# EAGLE board IO4-QuadAnalogSwitch-fake (EAGLE 7.7.0)
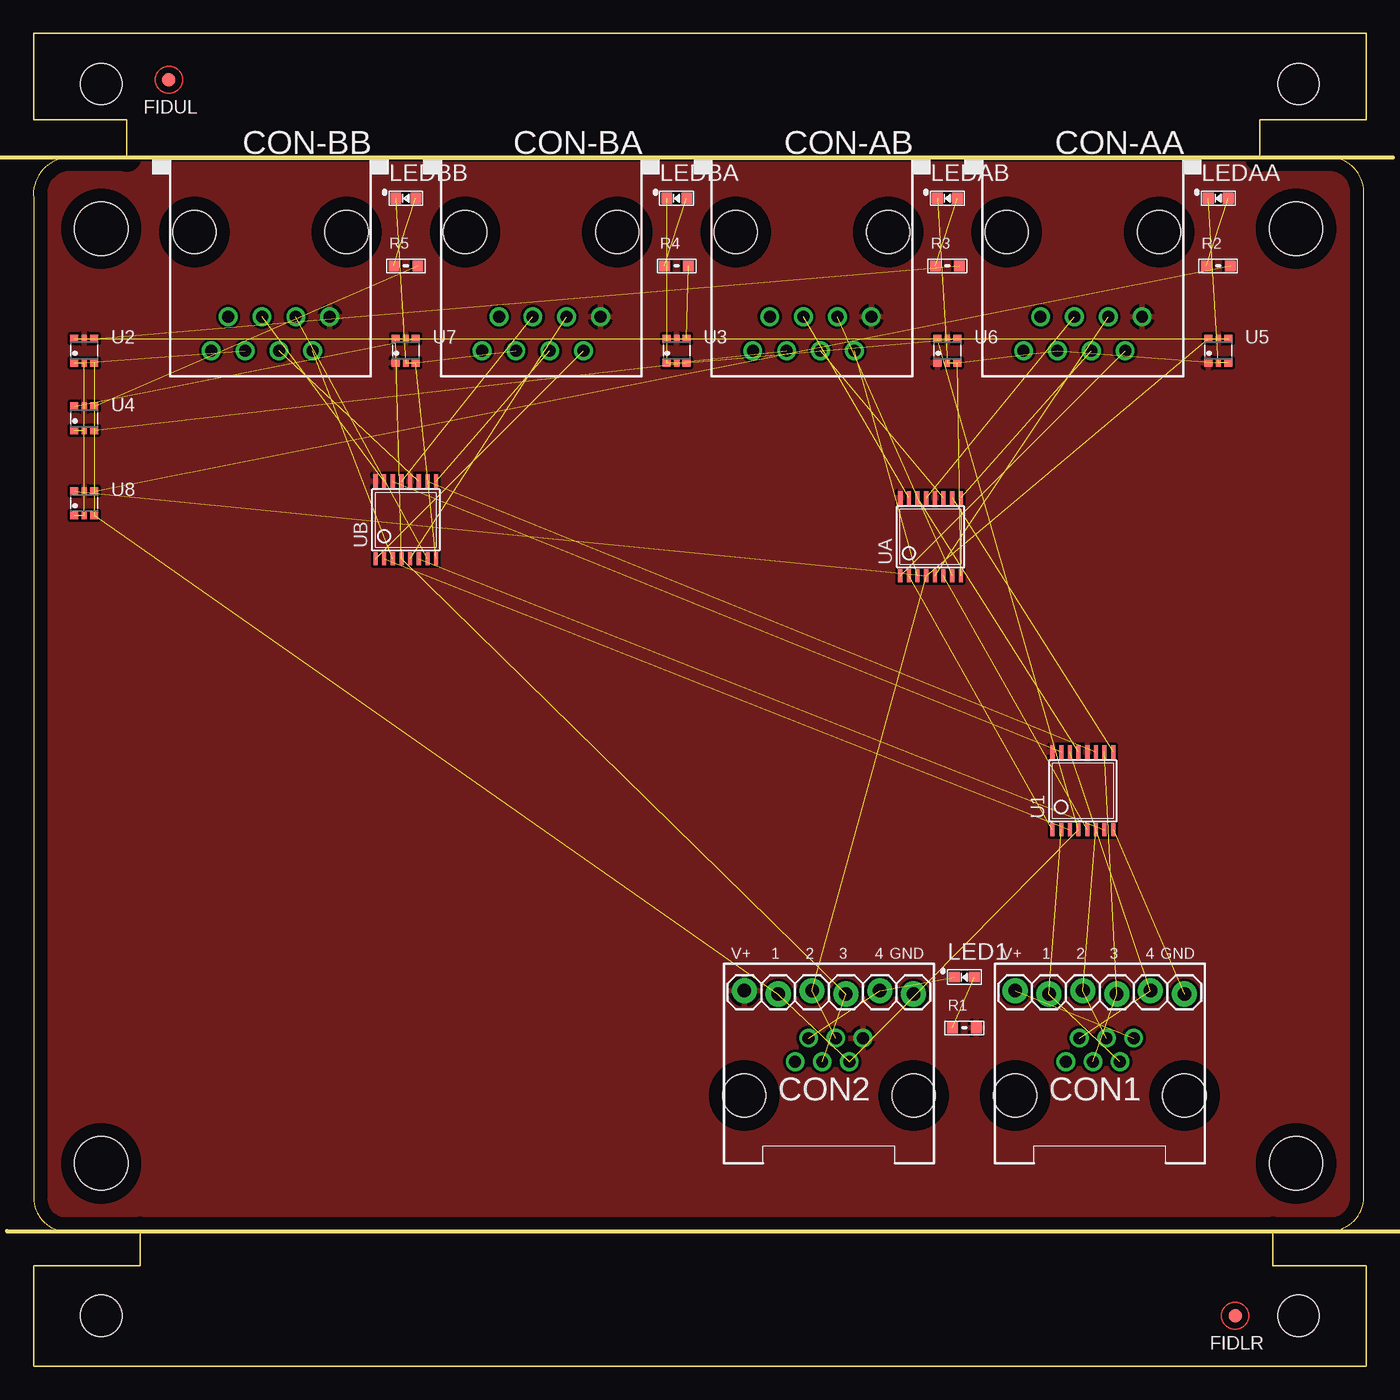
[diagram p0: board, top side]
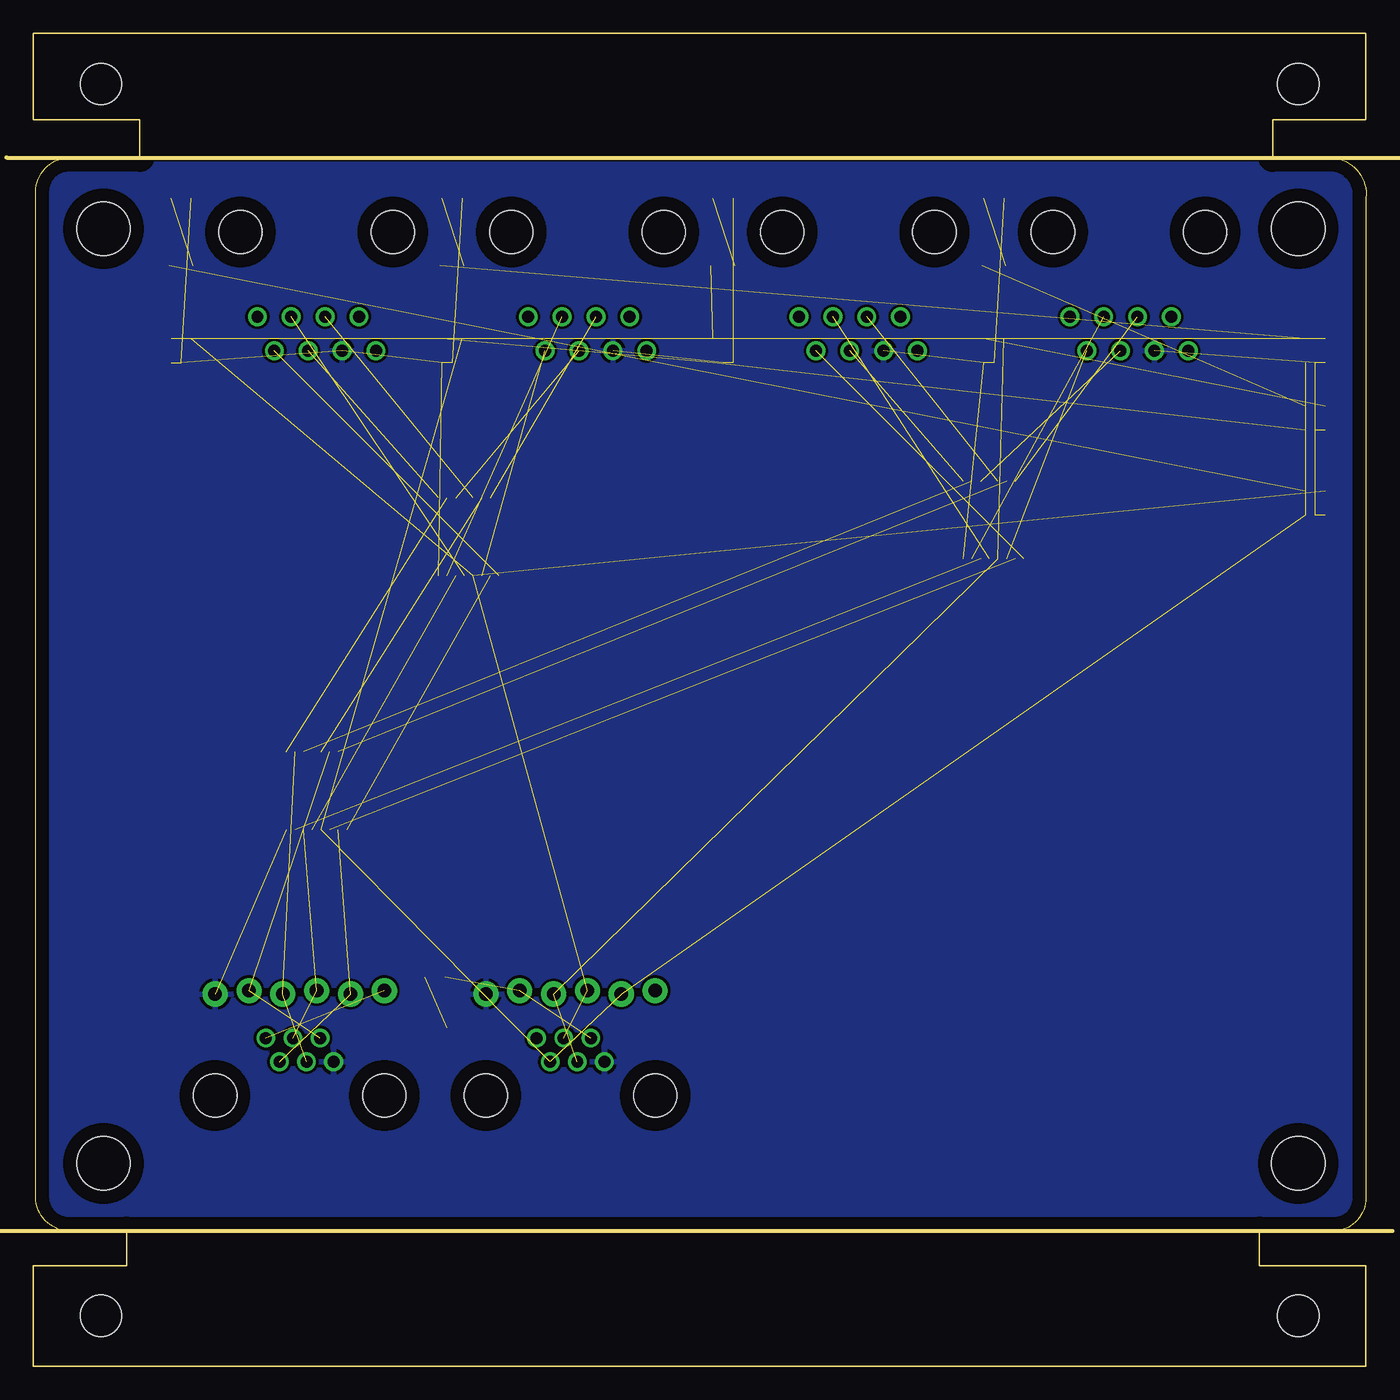
[diagram p1: board, bottom side, seen from below]

Size 100.01 x 100 mm. Coordinates in mm from the lower left corner, seen from the top.
Copper layers (1*16): Top 0.035mm / dielectric 1.5mm / Bottom 0.035mm
Design rules "default": minimum track width 10mil, minimum drill 0.6mm, track to track 8mil, track to pad 8mil, pad to pad 8mil, via to via 8mil, smd to smd 8mil, copper to edge 40mil, drill to drill 8mil, minimum pad ring 10mil, minimum via ring 8mil, stop-mask expansion 4mil, vias tented up to drill 0mil, thermal gap 10mil

## Footprints (pad centres in the part's own frame; a part is rotated, then mirrored left to right if it is on the bottom)
BOARD-DINRAIL-3.17INX10CM = hole 4: 94.742,15.24; 5.08,85.344; 94.742,85.344; 5.08,15.24 | hole 3.1: 5.08,96.19; 94.92,96.19; 5.08,3.81; 94.92,3.81
RJ24-INVERTED-PINS = drill 1.016 pad 1.88: 1 6.35,-4.064; 2 3.81,-3.81; 3 1.27,-4.064; 4 -1.27,-3.81; 5 -3.81,-4.064; 6 -6.35,-3.81 | drill 0.9 pad 1.4: 1@1 -2.54,-0.508; 2@1 -1.524,1.27; 3@1 -0.508,-0.508; 4@1 0.508,1.27; 5@1 1.524,-0.508; 6@1 2.54,1.27 | hole 3.251: 6.35,3.81; -6.35,3.81
RJ45-NO-SHIELD = drill 0.9 pad 1.4: 1 -4.445,6.35; 2 -3.175,8.89; 3 -1.905,6.35; 4 -0.635,8.89; 5 0.635,6.35; 6 1.905,8.89; 7 3.175,6.35; 8 4.445,8.89 | hole 3.251: -5.715,0; 5.715,0
FIDUCIAL_1MM = smd 1 x 1: 1 0,0
0603-LED = smd 0.8 x 0.8: A 0.75,0; C -0.75,0
0603-RES = smd 0.813 x 0.813: 1 -0.9,0; 2 0.9,0
MAX4702EUE+ = smd 0.305 x 0.991: 1 -2.275,-2.918; 2 -1.625,-2.918; 3 -0.975,-2.918; 4 -0.325,-2.918; 5 0.325,-2.918; 6 0.975,-2.918; 7 1.625,-2.918; 8 2.275,-2.918; 9 2.275,2.918; 10 1.625,2.918; 11 0.975,2.918; 12 0.325,2.918; 13 -0.325,2.918; 14 -0.975,2.918; 15 -1.625,2.918; 16 -2.275,2.918
SOT363 = smd 0.6 x 0.6: 1 -0.75,-0.9; 3 0.75,-0.9; 4 0.75,0.9; 6 -0.75,0.9 | smd 0.4 x 0.6: 2 0,-0.9; 5 0,0.9

## Placement (x,y rotation side)
BOARD1  [BOARD-DINRAIL-3.17INX10CM]  0.01,0 0 top
CON1  [RJ24-INVERTED-PINS]  80.02,24.13 180 top
CON2  [RJ24-INVERTED-PINS]  59.7,24.13 180 top
CON-AA  [RJ45-NO-SHIELD]  78.75,85.09 180 top
CON-AB  [RJ45-NO-SHIELD]  58.43,85.09 180 top
CON-BA  [RJ45-NO-SHIELD]  38.11,85.09 180 top
CON-BB  [RJ45-NO-SHIELD]  17.79,85.09 180 top
FIDLR  FIDUCIAL  [FIDUCIAL_1MM]  90.18,3.81 0 top
FIDUL  FIDUCIAL  [FIDUCIAL_1MM]  10.17,96.52 0 top
LED1  Y  [0603-LED]  69.86,29.21 0 top
LEDAA  Y  [0603-LED]  88.91,87.63 0 top
LEDAB  Y  [0603-LED]  68.59,87.63 0 top
LEDBA  Y  [0603-LED]  48.27,87.63 0 top
LEDBB  Y  [0603-LED]  27.95,87.63 0 top
R1  2K2  [0603-RES]  69.86,25.4 0 top
R2  2K2  [0603-RES]  88.91,82.55 0 top
R3  2K2  [0603-RES]  68.59,82.55 0 top
R4  2K2  [0603-RES]  48.27,82.55 0 top
R5  2K2  [0603-RES]  27.95,82.55 0 top
U1  MAX4702EUE+  [MAX4702EUE+]  78.75,43.18 0 top
U2  74LVC1G97GW  [SOT363]  3.82,76.2 0 top
U3  74LVC1G97GW  [SOT363]  48.27,76.2 0 top
U4  74LVC1G97GW  [SOT363]  3.82,71.12 0 top
U5  74LVC1G97GW  [SOT363]  88.91,76.2 0 top
U6  74LVC1G97GW  [SOT363]  68.59,76.2 0 top
U7  74LVC1G97GW  [SOT363]  27.95,76.2 0 top
U8  74LVC1G97GW  [SOT363]  3.82,64.77 0 top
UA  MAX4702EUE+  [MAX4702EUE+]  67.32,62.23 0 top
UB  MAX4702EUE+  [MAX4702EUE+]  27.95,63.5 0 top

## Library data of the parts
BOARD1 CON1 CON2 FIDLR FIDUL LED1 LEDAA LEDAB LEDBA LEDBB R1-R5 U1-U8 UA UB = SPCoast
CON-AA CON-AB CON-BA CON-BB = SPCoast; AMP: 520151-4; OPL: none

## Nets
1: CON1.1 CON1.1@1
!A: U3.3 U4.3 U6.4
!B: U2.6 U5.4
!C: U4.6 U7.4
A: CON2.2 CON2.2@1 U1.4 U2.3 U6.6 U8.3
A1: U1.1 UA.2
A2: U1.5 UA.6
A3: U1.9 UA.10
A4: U1.13 UA.14
AA1: CON-AA.2 UA.1
AA2: CON-AA.3 UA.5
AA3: CON-AA.4 UA.9
AA4: CON-AA.5 UA.13
AB1: CON-AB.2 UA.3
AB2: CON-AB.3 UA.7
AB3: CON-AB.4 UA.11
AB4: CON-AB.5 UA.15
B: CON2.3 CON2.3@1 U5.6 U8.6 UA.4
B1: U1.3 UB.2
B2: U1.7 UB.6
B3: U1.11 UB.10
B4: U1.15 UB.14
BA1: CON-BA.2 UB.1
BA2: CON-BA.3 UB.5
BA3: CON-BA.4 UB.9
BA4: CON-BA.5 UB.13
BB1: CON-BB.2 UB.3
BB2: CON-BB.3 UB.7
BB3: CON-BB.4 UB.11
BB4: CON-BB.5 UB.15
C: CON2.4 CON2.4@1 U3.6 U7.6 UB.4
COM1: CON1.2 CON1.2@1 U1.2
COM2: CON1.3 CON1.3@1 U1.6
COM3: CON1.4 CON1.4@1 U1.10
COM4: CON1.5 CON1.5@1 U1.14
GND: CON1.6 CON1.6@1 CON2.6 CON2.6@1 CON-AA.6 CON-AB.6 CON-BA.6 CON-BB.6 LEDAA.C LEDAB.C LEDBA.C LEDBB.C U1.8 U2.1 U2.2 U3.1 U3.2 U4.1 U4.2 U5.2 U5.3 U6.2 U6.3 U7.2 U7.3 U8.1 U8.2 UA.8 UB.8
N$7: LED1.A R1.1
N$8: CON2.5 CON2.5@1 LED1.C
N$9: LEDAA.A R2.1
N$16: LEDBB.A R5.1
N$17: LEDAB.A R3.1
N$18: R2.2 U8.4
N$19: LEDBA.A R4.1
N$20: R5.2 U4.4
N$22: R4.2 U3.4
N$25: R3.2 U2.4
VCC: CON2.1 CON2.1@1 CON-AA.1 CON-AB.1 CON-BA.1 CON-BB.1 R1.2 U1.12 U1.16 U2.5 U3.5 U4.5 U5.1 U5.5 U6.1 U6.5 U7.1 U7.5 U8.5 UA.12 UA.16 UB.12 UB.16

## Tracks (layer width: path | path; a pad name or v marks a point on that pad's centre or on a via)
1  (1 unrouted)
!A  (2 unrouted)
!B  (1 unrouted)
!C  (1 unrouted)
A  (5 unrouted)
A1  (1 unrouted)
A2  (1 unrouted)
A3  (1 unrouted)
A4  (1 unrouted)
AA1  (1 unrouted)
AA2  (1 unrouted)
AA3  (1 unrouted)
AA4  (1 unrouted)
AB1  (1 unrouted)
AB2  (1 unrouted)
AB3  (1 unrouted)
AB4  (1 unrouted)
B  (4 unrouted)
B1  (1 unrouted)
B2  (1 unrouted)
B3  (1 unrouted)
B4  (1 unrouted)
BA1  (1 unrouted)
BA2  (1 unrouted)
BA3  (1 unrouted)
BA4  (1 unrouted)
BB1  (1 unrouted)
BB2  (1 unrouted)
BB3  (1 unrouted)
BB4  (1 unrouted)
C  (4 unrouted)
COM1  (2 unrouted)
COM2  (2 unrouted)
COM3  (2 unrouted)
COM4  (2 unrouted)
GND  (21 unrouted)
  pour Bottom: 0.01,90.17 100.34,90.17 100.34,11.43 0.01,11.43
N$7  (1 unrouted)
N$8  (2 unrouted)
N$9  (1 unrouted)
N$16  (1 unrouted)
N$17  (1 unrouted)
N$18  (1 unrouted)
N$19  (1 unrouted)
N$20  (1 unrouted)
N$22  (1 unrouted)
N$25  (1 unrouted)
VCC
  pour Top: 0.01,90.17 100.34,90.17 100.34,11.43 0.01,11.43